# Altium PCB UccMod.PcbDoc
Units mil, origin at the board's own origin, x right, y up, seen from the top; angles counter-clockwise.
Board outline 970 x 1015 mil, 2 copper layers (Top Layer, Bottom Layer); 7 components, 8 nets, 35 pads, 29 vias.
Unrouted connection lines stored in the file: 2.
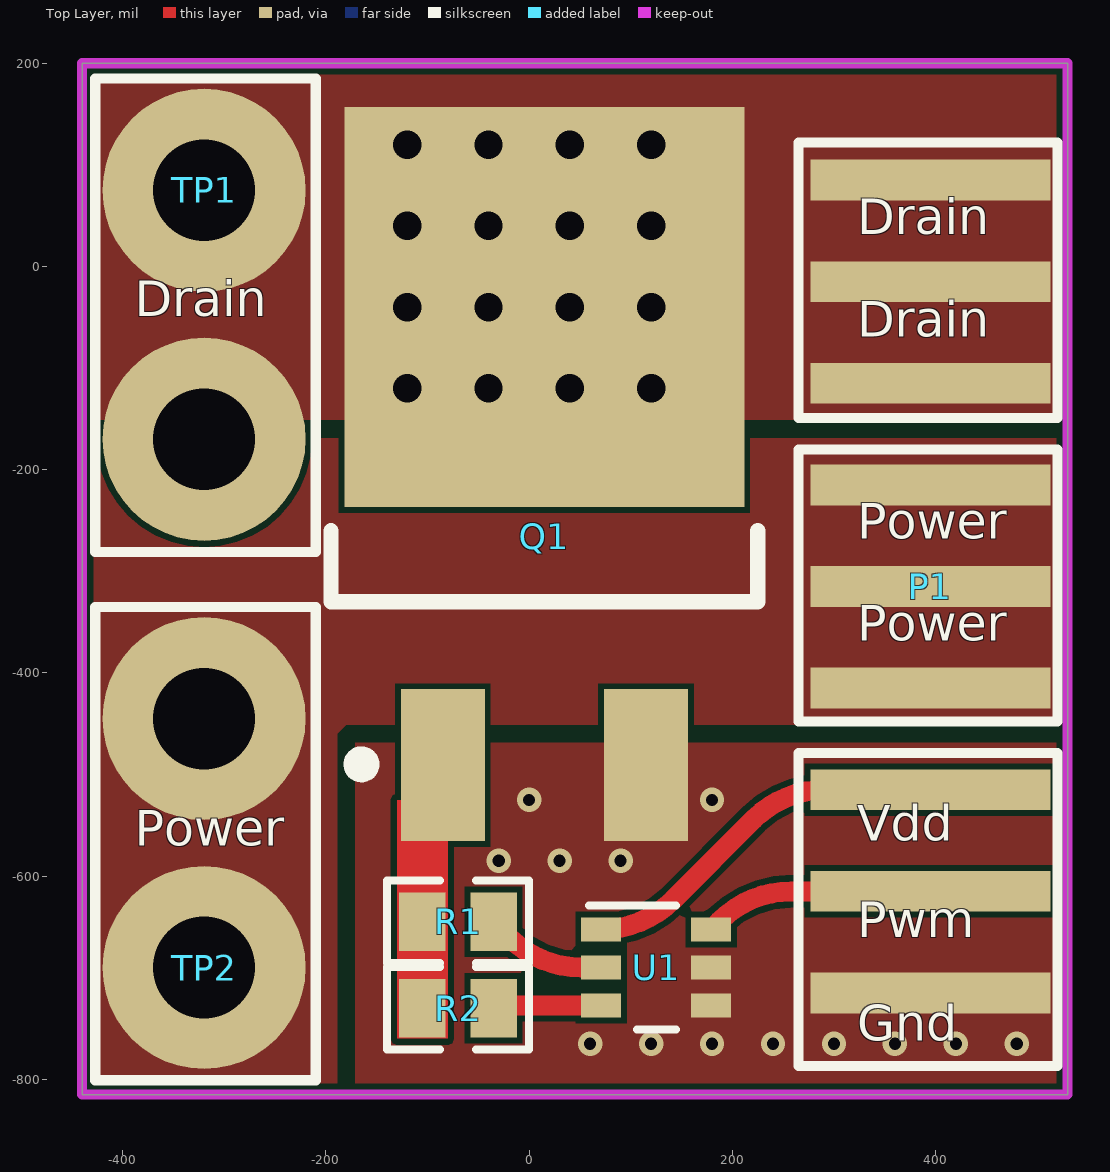
[diagram p0: Top Layer view]
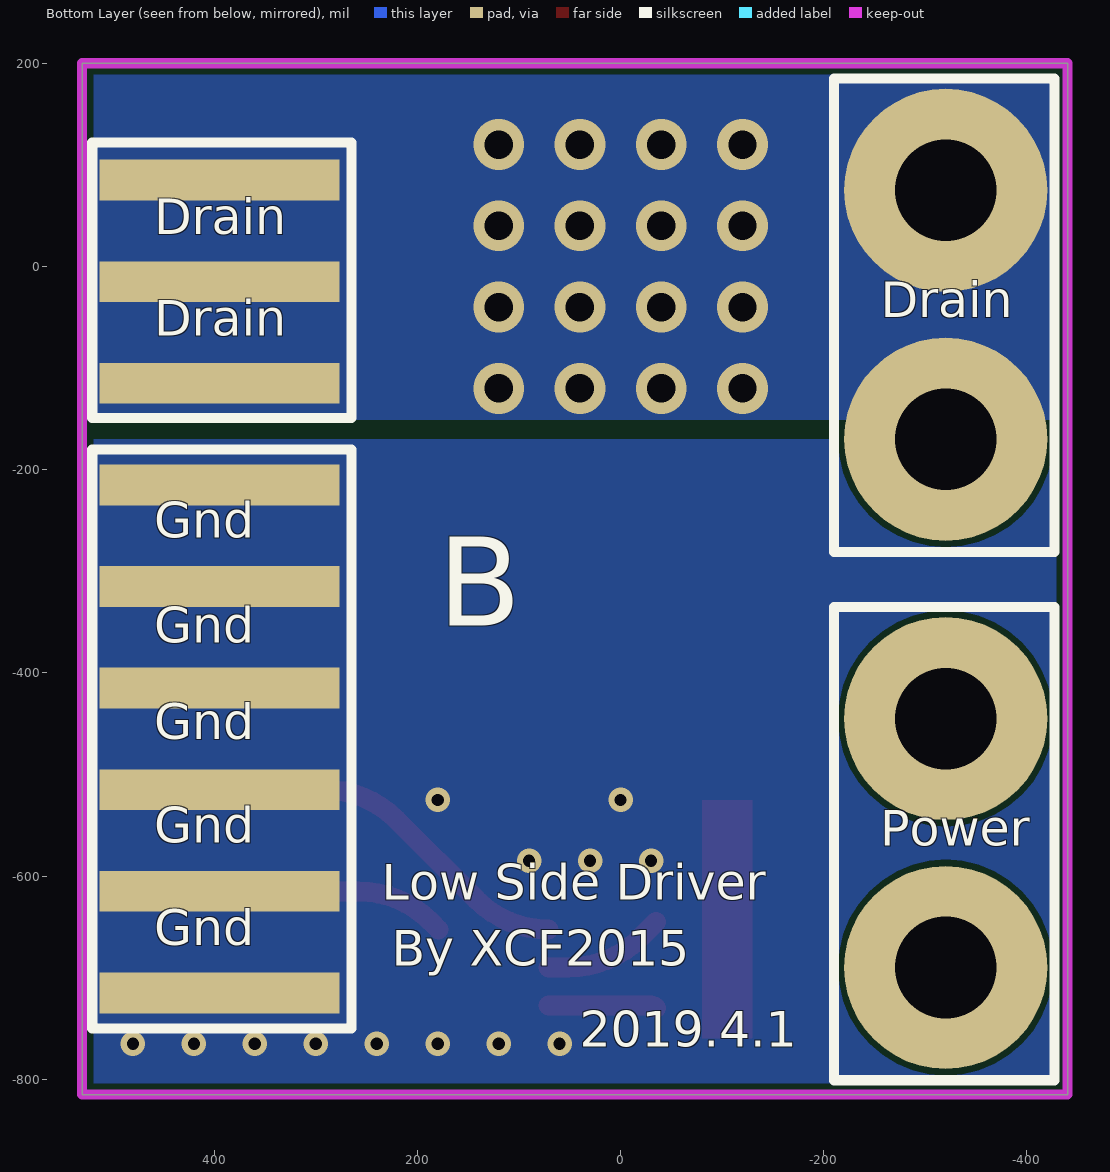
[diagram p1: Bottom Layer view, seen from below]
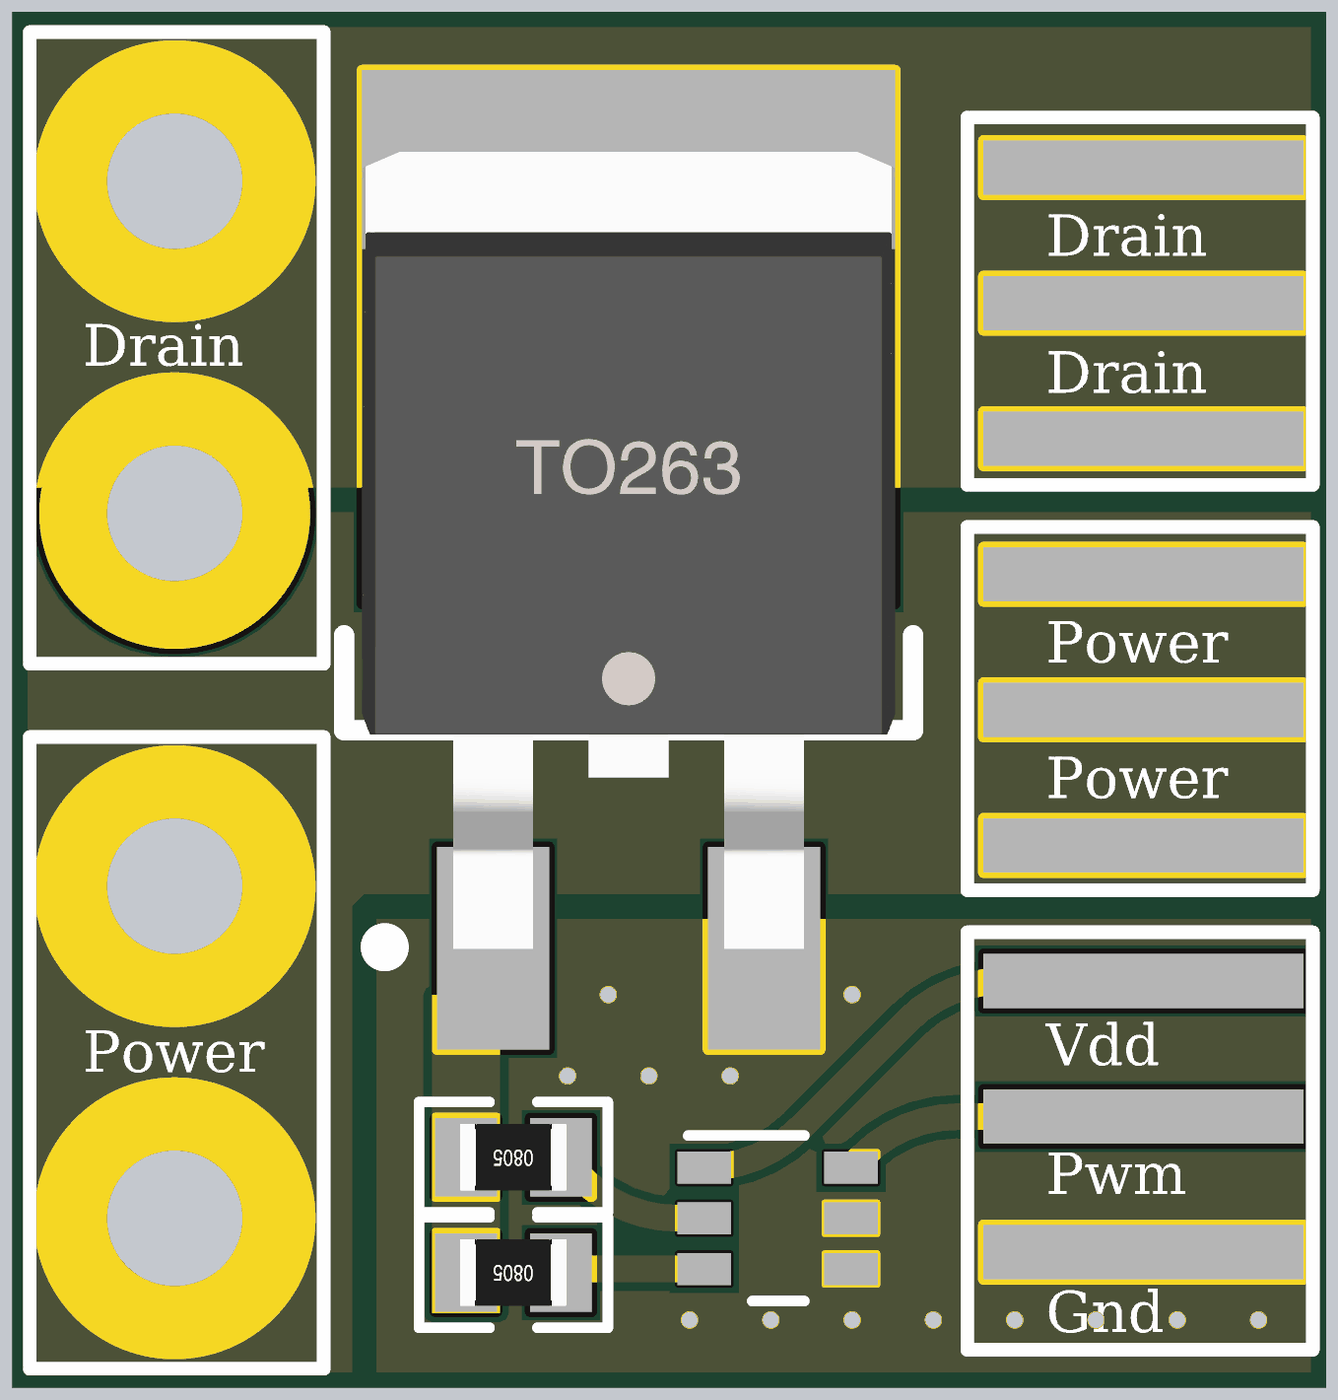
[diagram p2: 3D render of the assembled board from above, using the file's embedded part models]

## Layer stack, top to bottom
Top Solder: solder mask 0.4, Solder Resist, Dk 3.5
Top Layer: signal copper 1.4
Dielectric 1: dielectric 12.6, FR-4, Dk 4.8
Bottom Layer: signal copper 1.4
Bottom Solder: solder mask 0.4, Solder Resist, Dk 3.5

## Board outline
-440,-815 -440,200 530,200 530,-815

## Design rules (kind name [scope] priority, off if disabled: settings)
Clearance [All] p1: gap=6 ignorepadtopadclearanceinfootprint=FALSE
HoleSize [All] p1: absolutevalues=TRUE maxlimit=10000 minlimit=11.81 maxpercent=80.000 minpercent=20.000
MinimumSolderMaskSliver [All] p1: minsoldermaskwidth=0
PolygonConnect [All] p1: connectstyle=Direct reliefconductorwidth=10 reliefentries=4 polygonreliefangle="90 Angle" airgapwidth=10
RoutingVias [All] p1: holewidth=28 width=50 viastyle="Through Hole" minholewidth=28 minwidth=50 maxholewidth=28 maxwidth=50
SilkToSilkClearance [All] p1: silktosilkclearance=0
SilkToSolderMaskClearance [IsPad] p1: minsilkscreentomaskgap=0 clearancetoexposedcopper=TRUE
SolderMaskExpansion [All] p1: expansion=4
Width [All] p1: maxlimit=39370.08 minlimit=19.68 preferedwidth=19.68
26 further rules are at their usual default settings.

## Components (designator, comment, footprint, x,y, rotation, side; value= is the part's Value field where it differs from the comment)
P1 "Header 9X2" "TB2.54 9x2" 395,85 r0 top
Q1 "2SK3615" IRF3205 15,-40 r0 top
R1 "0Ω (0R0) ±1%" 0805_R -70,-645 r180 top
R2 "0Ω (0R0) ±1%" 0805_R -70,-730 r180 top
TP1 "TEST" R50#1 -390,10 r90 top
TP2 "TEST" R50#2 -320,-690 r90 top
U1 "UCC27511DBVR" DBV0006A_N 125,-690 r0 top value=Value

## Footprints (in the part's own frame and the unit in brackets; to place one, negate y for a bottom-side part, rotate by r counter-clockwise, add the part's x,y. Pads: shape width x height; smd on the part's side, far side on the other; paste and mask are expansions set on the pad)
0805_R [mm]
  rect 1.16x1.47 smd: 1(-0.89,0) 2(0.89,0)
  silkscreen extent -1.77,-1.04 1.77,1.03, body extent -1,-0.62 1,0.63, height 0.49
DBV0006A_N [mm]
  rect 1x0.6 smd paste+0 mask+0.051: 1(-1.375,0.95) 2(-1.375,0) 3(-1.375,-0.95) 4(1.375,-0.95) 5(1.375,0) 6(1.375,0.95)
  silkscreen extent -1.68,-1.55 0.5,1.55, body extent -0.89,-1.52 0.89,1.55, height 0.25
IRF3205 [mm] "263，3脚晶体管"
  rect 2.1x3.8 smd: 1(-2.54,-11.45) 3(2.54,-11.45)
  rect 10x10 smd: 2(0,0)
  silkscreen extent -5.33,-11.63 5.33,-5.59, body extent -5,-11.46 5,3.47, height 4.5
R50#1 [mil]
  round 200 hole 100: 1(65,-70)
R50#2 [mil]
  round 200 hole 100: 1(0,0)
"TB2.54 9x2" [mm]
  rect 6x1.02 smd: 1(0,0) 3(0,-2.54) 5(0,-5.08) 7(0,-7.62) 9(0,-10.16) 11(0,-12.7) 13(0,-15.24) 15(0,-17.78) 17(0,-20.32)
  rect 6x1.02 smd far side: 2(0,0) 4(0,-2.54) 6(0,-5.08) 8(0,-7.62) 10(0,-10.16) 12(0,-12.7) 14(0,-15.24) 16(0,-17.78) 18(0,-20.32)

## Part data
P1: "9*2P接插件", BOM名称=9*2P, 学习资源=www.oooc
Q1: library part NMOS, "N沟场效应管", BOM名称=N¹, 学习资源=www.oooc
R1 R2: library part "0805 0Ω (0R0) 1%", "贴片电阻", Package=0805, SuppliersPartNumber=C17477, ComponentLink1Description=供应, ComponentLink1URL=http://www.szlcsc.com/product/details_18165.html, Supplier=LC
TP1 TP2: "测试点", 学习资源=www.oooc
U1: "Imported", Alternate_PartNumber=UCC27511DBVT, Manufacturer="Texas Instruments", CompType=IC, MountType=SMT, PackageReference=DBV0006A, PartNumber=UCC27511DBVR, PIN_COUNT=6, RefDes=RefDes, RoHS=Y, Type=TYPE

## Free pads (board coordinates)
  round 200 hole 100: 2(-320,-170) 3(-320,-445)

## Via types
v1: diameter 50, hole 28, Top Layer to Bottom Layer, 16 vias
v2: diameter 24, hole 12, Top Layer to Bottom Layer, tented both sides, 13 vias

## Nets (pads, with @x,y where several pads share a name; then routed paths per layer and width w, separated by ;. In a path a pad name is that pad's centre, name@x,y a point inside that pad or via, vN(x,y) a via of type N, cw(c..) or ccw(c..) an arc to the next point about the centre after c; other vN are vias at no path point)
GND: P1.8 P1.10 P1.12 P1.14 P1.16 P1.17 P1.18 Q1.3 U1.4 U1.5
  other v2: 60,-765 120,-765 180,-765 240,-765 300,-765 360,-765 420,-765 480,-765 -30,-585 30,-585 90,-585 0,-525 180,-525
NetQ1_1: Q1.1 R1.2 R2.2
NetQ1_2: P1.1 P1.2 P1.3 P1.4 P1.5 P1.6 pad.2 Q1.2 TP1.1
  other v1: -120,-120 -40,-120 40,-120 120,-120 -120,-40 -40,-40 40,-40 120,-40 -120,40 -40,40 40,40 120,40 -120,120 -40,120 40,120 120,120
NetR1_1: R1.1 U1.2 | length 120.2
  Top Layer w19.68: R1.1 -19.25,-660.71 ccw(c51.46,-590) 51.46,-690 U1.2
NetR2_1: R2.1 U1.3 | length 106.5
  Top Layer w19.68: R2.1 cw(c-28.69,-736.27) -28.69,-727.4 U1.3
Pwm: P1.15 U1.6 | length 227.1
  Top Layer w19.68: U1.6 187.44,-644.29 cw(c258.15,-715) 258.15,-615 P1.15
VD: P1.13 U1.1 | length 372.5
  Top Layer w19.68: U1.1 70.98,-652.6 ccw(c70.98,-552.6) 141.69,-623.31 220.71,-544.29 cw(c291.42,-615) 291.42,-515 P1.13
VM: P1.7 P1.9 P1.11 pad.3 TP2.1

## Polygon pours and split planes (outlines as drawn)
GND on Top Layer "Top Layer-GND" (solid, pour order 10): -189,-815 -171,-815 -171,-469 530,-469 530,-815
NetQ1_2 on Top Layer "Top Layer-NetQ1_2" (solid, pour order 9): -440,200 -440,-151 530,-151 530,200
VM on Top Layer "Top Layer-VM" (solid, pour order 8): -440,-815 -189,-815 -189,-460 -180,-451 530,-451 530,-169 -440,-169
GND on Bottom Layer "GND_L02_P012" (solid, pour order 12): 530,-170 -440,-170 -440,-815 530,-815
NetQ1_2 on Bottom Layer "NETQ1_2_L02_P011" (solid, pour order 11): -440,200 -440,-151 530,-151 530,200

## Keep-outs
Keep-Out Layer:
  the board outline again, w10

## Other copper
Top Layer:
  rectangle net NetQ1_1: -130,-760 -80,-525

## Silkscreen, mask and mechanical layers (free items; w line width, h text height)
Top Overlay:
  lines w10: -427,-801 -210,-801 -210,-335 -427,-335 -427,-801 ; -427,-281 -427,185 -210,185 -210,-281 -427,-281 ; 265,-787 265,-479 520,-479 520,-787 265,-787 ; 265,-448 265,-180 520,-180 520,-448 265,-448 ; 265,-149 265,122 520,122 520,-149 265,-149
  text "Drain" at 323,20 h60
  text "Drain" at -388,-61 h60
  text "Drain" at 323,-81 h60
  text "Power" at 323,-280 h60
  text "Power" at 323,-380 h60
  text "Vdd" at 323,-577 h60
  text "Power" at -388,-582 h60
  text "Pwm" at 323,-672 h60
  text "Gnd" at 323,-774 h60
Bottom Overlay:
  lines w10: -427,-801 -210,-801 -210,-335 -427,-335 -427,-801 ; -427,-281 -210,-281 -210,185 -427,185 -427,-281 ; 265,-750 520,-750 520,-180 265,-180 265,-750 ; 265,-149 520,-149 520,122 265,122 265,-149
  text "Drain" at 459,20 h60
  text "Drain" at -256,-62 h60
  text "Drain" at 459,-80 h60
  text "Gnd" at 459,-279 h60
  text "B" at 180,-382 h150
  text "Gnd" at 459,-382 h60
  text "Gnd" at 459,-477 h60
  text "Gnd" at 459,-579 h60
  text "Power" at -255.71,-582 h60
  text "Low Side Driver" at 235,-635 h60
  text "Gnd" at 459,-680 h60
  text "By XCF2015" at 225,-700 h60
  text "2019.4.1" at 40,-780 h60
Bottom Solder:
  rectangle: -160,-160 160,160